# Altium PCB VCO_Max2606.PcbDoc
Units mm, origin at the board's own origin, x right, y up, seen from the top; angles counter-clockwise.
Board outline 50 x 50 mm, 2 copper layers (Top Layer, Bottom Layer); 13 components, 10 nets, 32 pads, 0 vias.
Unrouted connection lines stored in the file: 7.
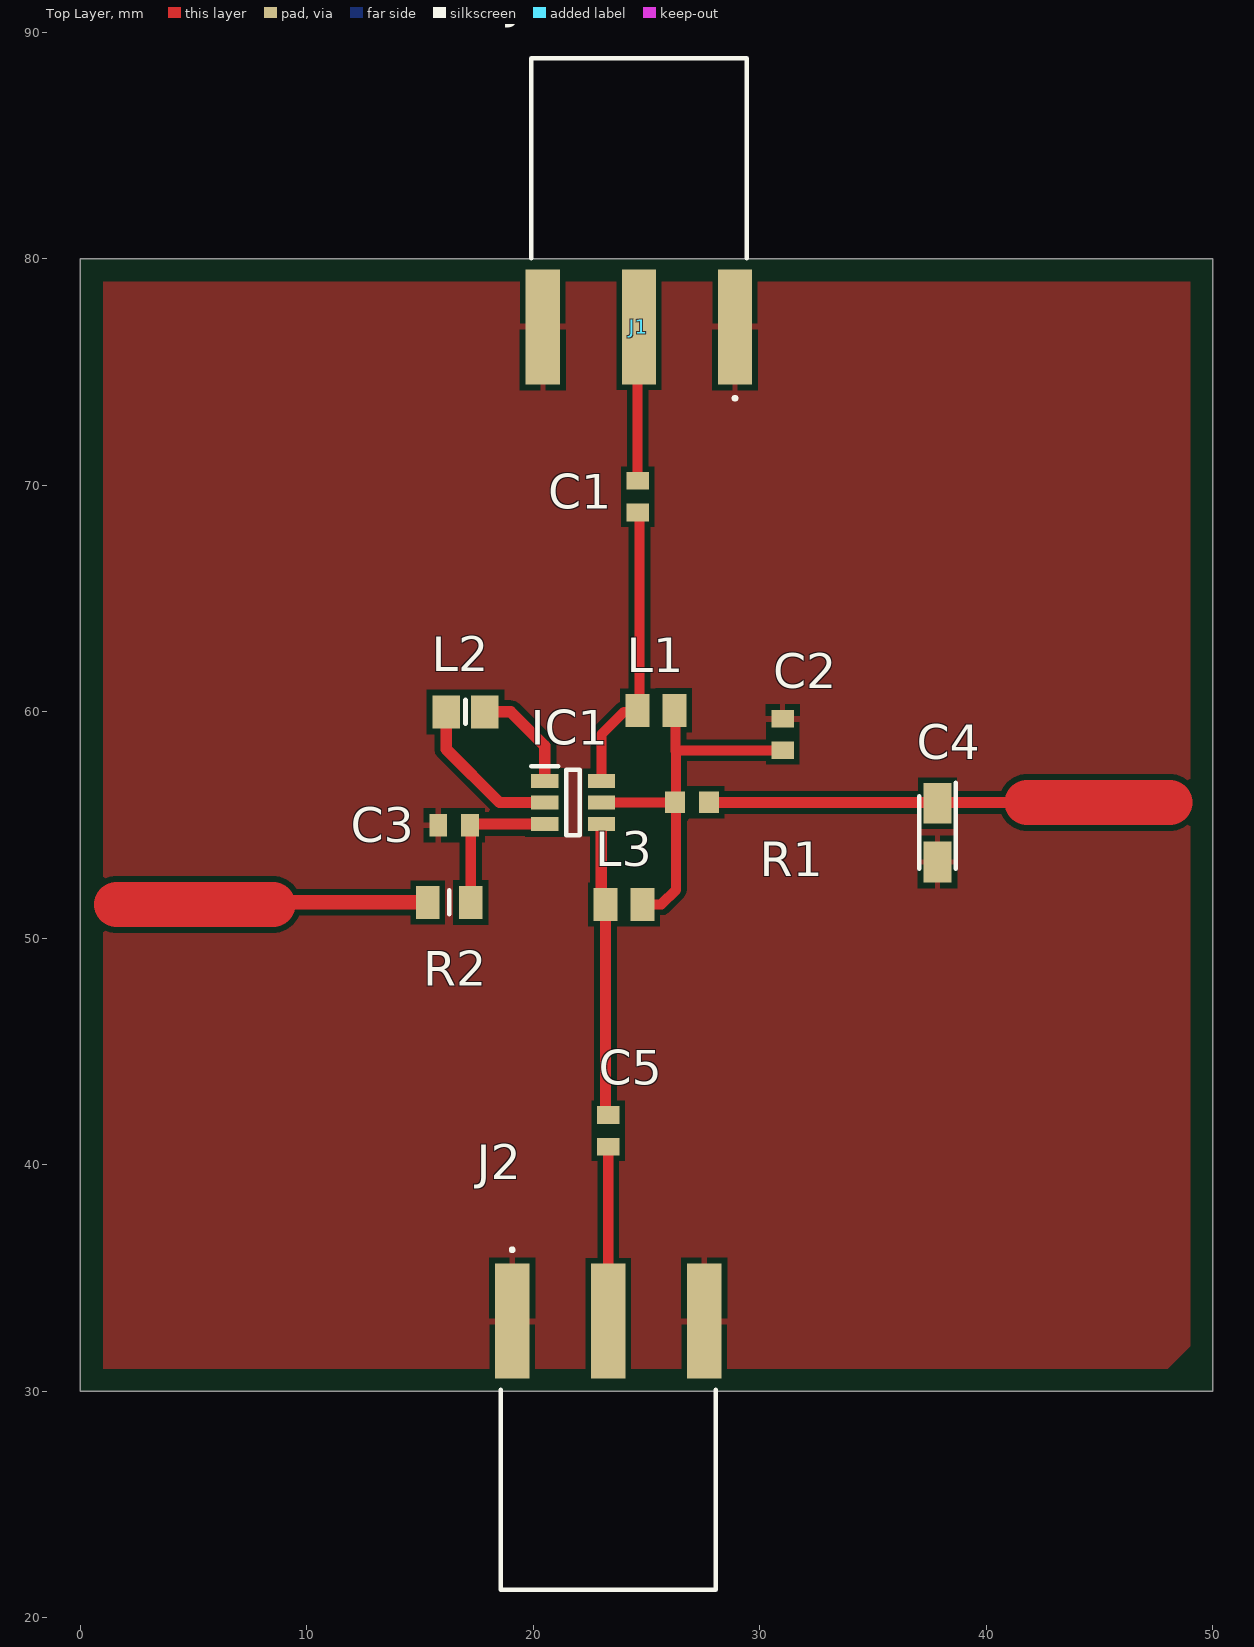
[diagram p0: Top Layer view]
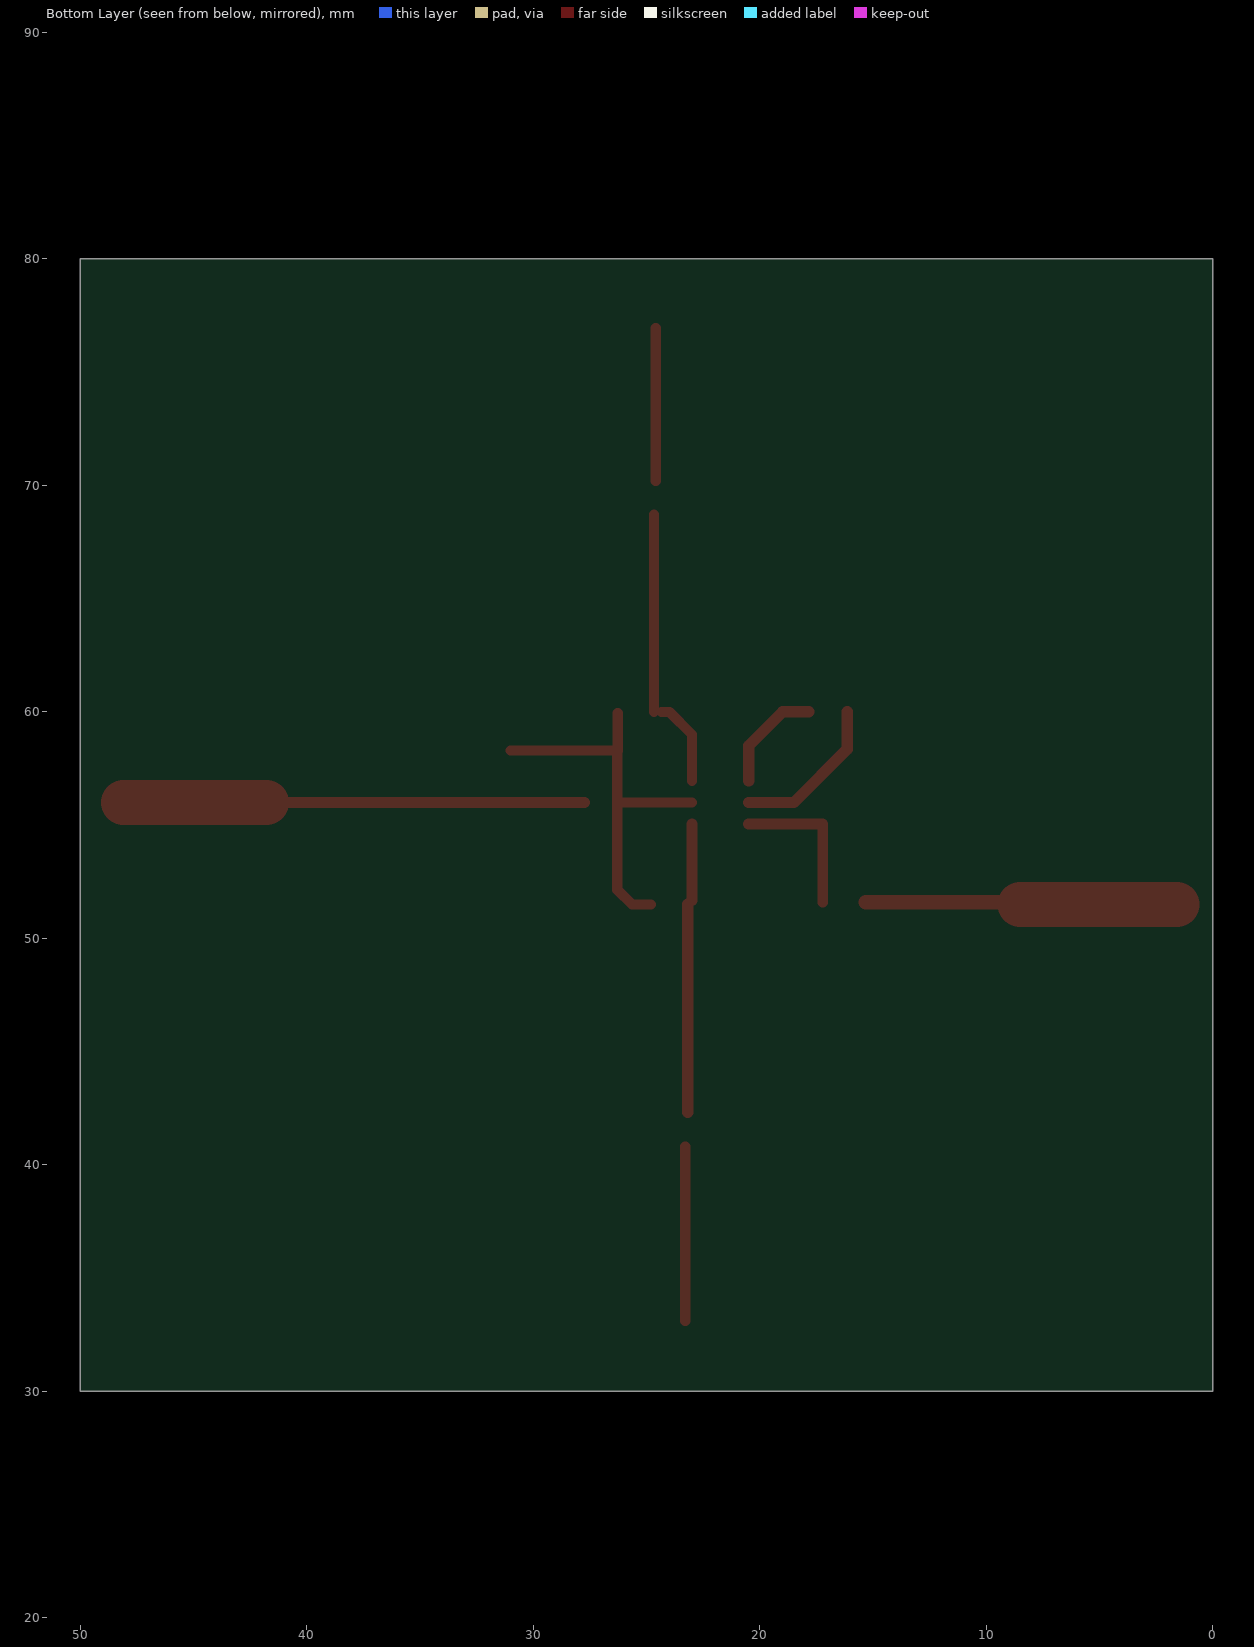
[diagram p1: Bottom Layer view, seen from below]

## Layer stack, top to bottom
Top Solder: solder mask 0.0102, Solder Resist, Dk 3.5
Top Layer: signal copper 0.0356
Dielectric 1: dielectric 0.32, FR-4, Dk 4.8
Bottom Layer: signal copper 0.0356
Bottom Solder: solder mask 0.0102, Solder Resist, Dk 3.5

## Board outline
0,30 50,30 50,80 0,80

## Design rules (kind name [scope] priority, off if disabled: settings)
Clearance [All] p1: gap=0.254 ignorepadtopadclearanceinfootprint=FALSE except(0: Arc-Hole Track-Hole SMDPad-Hole THPad-Hole Via-Hole Fill-Hole Poly-Hole Region-Hole Text-Hole)
PolygonConnect [All] p1: connectstyle=Relief reliefconductorwidth=0.254 reliefentries=4 polygonreliefangle="90 Angle" airgapwidth=0.254
RoutingVias [All] p1: holewidth=0.711 width=1.27 viastyle="Through Hole" minholewidth=0.711 minwidth=1.27 maxholewidth=0.711 maxwidth=1.27
SolderMaskExpansion [All] p1: expansion=0.102 istentingtop=FALSE
Width [All] p1: maxlimit=0.254 minlimit=0.254 preferedwidth=0.254
30 further rules are at their usual default settings.

## Components (designator, comment, footprint, x,y, rotation, side; value= is the part's Value field where it differs from the comment)
C1 "4.7 pF" CAPC1608X90N 24.6,69.5 r90 top
C2 "1 nF" CAPC1608X90N 31,59 r270 top
C3 "1 nF" CAPC1608X90N 16.5,55 r0 top
C4 "10 uF" CAPPM3216X180N 37.84,54.67 r270 top
C5 "4.7 pF" CAPC1608X90N 23.3,41.5 r270 top
IC1 "MAX2606EUT+T" SOT95P280X145-6N 21.75,56 r0 top
J1 "CONSMA020.042-G" CONSMA020042G 24.66,84.1 r180 top
J2 "CONSMA020.042-G" CONSMA020042G 23.3,26 r0 top
L1 "0805CS-330XJLC" CAPC2012X130N 25.41,60.06 r0 top
L2 "270 nH" INDC2012X105N 17,60 r0 top
L3 "0805CS-330XJLC" CAPC2012X130N 24,51.5 r180 top
R1 "10 Ohm" RESC1608X55N 27,56 r0 top
R2 "270 Ohm" RESC2012X65N 16.28,51.59 r0 top

## Footprints (in the part's own frame and the unit in brackets; to place one, negate y for a bottom-side part, rotate by r counter-clockwise, add the part's x,y. Pads: shape width x height; smd on the part's side, far side on the other; paste and mask are expansions set on the pad)
CAPC1608X90N [mm]
  rect 0.78x0.99 smd: 1(-0.7,0) 2(0.7,0)
  body extent -0.8,-0.41 0.8,0.41, height 0.9
CAPC2012X130N [mm]
  rect 1.07x1.47 smd: 1(-0.82,0) 2(0.82,0)
  body extent -1,-0.63 1,0.63, height 1.3
CAPPM3216X180N [mm]
  rect 1.8x1.25 smd: 1(-1.3,0) 2(1.3,0)
  silkscreen extent -2.2,-0.8 1.6,0.8, body extent -1.7,-0.95 1.7,0.95, height 1.83
CONSMA020042G [mm]
  rect 1.52x5.08 smd: 1(-4.24,7.1) 2(0,7.1) 3(4.24,7.1)
  silkscreen extent -4.75,-4.75 4.75,10.3, body extent -4.76,4.69 4.76,12.61, height 14.27
INDC2012X105N [mm]
  rect 1.2x1.45 smd: 1(-0.85,0) 2(0.85,0)
  silkscreen extent 0,-0.53 0,0.53, body extent -1,-0.63 1,0.63, height 1.05
RESC1608X55N [mm]
  rect 0.9x0.95 smd: 1(-0.75,0) 2(0.75,0)
  body extent -0.77,-0.4 0.77,0.4, height 0.46
RESC2012X65N [mm]
  rect 1.05x1.45 smd: 1(-0.95,0) 2(0.95,0)
  silkscreen extent 0,-0.53 0,0.53, body extent -1,-0.63 1,0.63, height 0.65
SOT95P280X145-6N [mm]
  rect 1.2x0.6 smd: 1(-1.25,0.95) 2(-1.25,0) 3(-1.25,-0.95) 4(1.25,-0.95) 5(1.25,0) 6(1.25,0.95)
  silkscreen extent -1.85,-1.45 0.3,1.6, body extent -1.4,-1.45 1.4,1.45, height 1.45

## Part data
C1 C5: library part CL10C4R7BB8NNNC, "Capacitor", Manufacturer_Name=SAMSUNG, Mouser Part Number=N/A, Arrow Part Number=CL10C4R7BB8NNNC, Arrow Price/Stock=https://www.arrow.com/en/products/cl10c4r7bb8nnnc/samsung-electro-mechanics, Datasheet Link=https://datasheet.datasheetarchive.com/originals/distributors/Datasheets_SAMA/0a1f72ba4d3cd833564e5daafcd80580.pdf, Height=0.9mm, Manufacturer_Part_Number=CL10C4R7BB8NNNC, Mouser Price/Stock=https://www.mouser.com/Search/Refine.aspx?Keyword=N%2FA
C2 C3: library part 06033D224MAT4A, "Capacitor", Manufacturer_Name="Kyocera AVX", Mouser Part Number=581-06033D224MAT4A, Datasheet Link=https://componentsearchengine.com/Datasheets/1/06031A100FAT2A.pdf, Height=0.9mm, Manufacturer_Part_Number=06033D224MAT4A, Mouser Price/Stock=https://www.mouser.co.uk/ProductDetail/AVX/06033D224MAT4A?qs=XLNwXgtzMM%2FMFiOH0A%252BeuQ%3D%3D
C4: library part T491A106M010AT7454, "Capacitor Polarised", Manufacturer_Name=KEMET, Mouser Part Number=80-T491A106M10AT7454, Arrow Part Number=T491A106M010AT7454, Arrow Price/Stock=https://www.arrow.com/en/products/t491a106m010at7454/kemet-corporation?region=nac, Datasheet Link=https://connect.kemet.com:7667/gateway/IntelliData-ComponentDocumentation/1.0/download/specsheet/T491A106M010AT, Height=1.8mm, Manufacturer_Part_Number=T491A106M010AT7454, Mouser Price/Stock=https://www.mouser.co.uk/ProductDetail/KEMET/T491A106M010AT7454?qs=WOKUqv%2F%2FT%2FY3El0Op9fdSQ%3D%3D
IC1: "Integrated Circuit", Manufacturer_Name="Analog Devices", Mouser Part Number=700-MAX2606EUTT, Datasheet Link=https://www.mouser.co.uk/datasheet/2/256/MAX2605-MAX2609-1515582.pdf, Height=1.45mm, Manufacturer_Part_Number=MAX2606EUT+T, Mouser Price/Stock=https://www.mouser.co.uk/ProductDetail/Analog-Devices-Maxim-Integrated/MAX2606EUT%2bT?qs=GxOUx7aO6nxQrK5ySdDhWg%3D%3D
J1 J2: "Connector", Manufacturer_Name="Linx Technologies", Mouser Part Number=712-CONSMA020.042-G, Datasheet Link=https://linxtechnologies.com/wp/wp-content/uploads/consma020.042-g-ds.pdf, Height=7.92mm, Manufacturer_Part_Number=CONSMA020.042-G, Mouser Price/Stock=https://www.mouser.co.uk/ProductDetail/Linx-Technologies/CONSMA020.042-G?qs=7D1LtPJG0i3DlJhqoQK7wQ%3D%3D
L1 L3: "Inductor", Manufacturer_Name=COILCRAFT, Mouser Part Number=994-0805CS-330XJLC, Datasheet Link=https://www.coilcraft.com/getmedia/dd5f20e4-1ff7-43df-8317-b693eb2dce3e/0805cs.pdf, Height=1.52mm, Manufacturer_Part_Number=0805CS-330XJLC, Mouser Price/Stock=https://www.mouser.com/Search/Refine.aspx?Keyword=994-0805CS-330XJLC
L2: library part MLF2012DR27JTD25, "Inductor", Manufacturer_Name=TDK, Mouser Part Number=810-MLF2012DR27JTD25, Datasheet Link=https://product.tdk.com/system/files/dam/doc/product/inductor/inductor/smd/catalog/inductor_automotive_standard_mlf2012_en.pdf, Height=1.05mm, Manufacturer_Part_Number=MLF2012DR27JTD25, Mouser Price/Stock=https://www.mouser.co.uk/ProductDetail/TDK/MLF2012DR27JTD25?qs=u4%252BEJ9urDAQ6h1SpGgiCDg%3D%3D
R1: library part RT0603FRD0710RL, "Resistor", Manufacturer_Name=KEMET, Mouser Part Number=603-RT0603FRD0710RL, Datasheet Link=https://datasheet.datasheetarchive.com/originals/distributors/Datasheets_SAMA/a1f8f48f216d234b3e6a96d43a77a0c1.pdf, Height=0.55mm, Manufacturer_Part_Number=RT0603FRD0710RL, Mouser Price/Stock=https://www.mouser.co.uk/ProductDetail/Yageo/RT0603FRD0710RL/?qs=k2KEx2DUIRT6hVLH%252BBT1HQ%3D%3D
R2: library part PCF0805R-3K24BT1, "Resistor", Manufacturer_Name="TT Electronics", Mouser Part Number=756-PCF0805R3K24BT1, Datasheet Link=https://componentsearchengine.com/Datasheets/1/PCF0805-13-10KBT1.pdf, Height=0.65mm, Manufacturer_Part_Number=PCF0805R-3K24BT1, Mouser Price/Stock=https://www.mouser.com/Search/Refine.aspx?Keyword=756-PCF0805R3K24BT1

## Nets (pads, with @x,y where several pads share a name; then routed paths per layer and width w, separated by ;. In a path a pad name is that pad's centre, name@x,y a point inside that pad or via, vN(x,y) a via of type N, cw(c..) or ccw(c..) an arc to the next point about the centre after c; other vN are vias at no path point)
GND: C2.1 C3.1 C4.2 J1.1 J1.3 J2.1 J2.3
NetC1_1: C1.1 IC1.6 L1.1
NetC1_2: C1.2 J1.2 | length 6.7
  Top Layer w0.45: C1.2 J1.2@24.6,76.94
NetC2_2: C2.2 IC1.5 L1.2 L3.1 R1.1 | length 17.5
  Top Layer w0.254: 26.25,58.25 26.3,58.3
  Top Layer w0.45: IC1.5 R1.1 ; L3.1 25.65,51.5 26.3,52.15 R1.1@26.3,56 ; 26.275,58.275 L1.2@26.275,59.955 ; R1.1@26.3,56.05 26.3,58.3 C2.2
NetC3_2: C3.2 IC1.3 R2.2 | length 6.6
  Top Layer w0.45: R2.2 C3.2@17.23,54.97
  Top Layer w0.5: C3.2@17.25,55.05 IC1.3
NetC5_1: C5.1 IC1.4 L3.2
NetC5_2: C5.2 J2.2
NetIC1_1: IC1.1 L2.2 | length 4.8
  Top Layer w0.5: L2.2 19,60 20.5,58.5 IC1.1
NetIC1_2: IC1.2 L2.1 | length 7
  Top Layer w0.5: L2.1 16.15,58.35 18.5,56 IC1.2
VCC: C4.1 R1.2 | length 20.4
  Top Layer w0.5: R1.2 C4.1@38.3,56 ; C4.1@38.2,56 41.8,56
  Top Layer w2: 41.8,56 48.1,56
pads on no net: R2.1
copper on no net: | length 46.5
  Top Layer w0.254: 26.25,56 26.3,56.05
  Top Layer w0.45: 23,56.95 23,59 24,60 24.34,60 ; 23.3,33.1 23.3,40.8 ; 24.68,60 24.68,68.72
  Top Layer w0.5: 23,51.68 23,55.05 ; 23.18,42.32 23.18,51.5
  Top Layer w0.65: 8.59,51.59 15.33,51.59
  Top Layer w2: 1.6,51.5 8.5,51.5

## Polygon pours and split planes (outlines as drawn)
GND on Top Layer "GND_L01_P000" (solid, remove dead copper, pour order 0): 1,79 49,79 49,32 48,31 1,31